# Altium PCB chess_timer.PcbDoc
Units mm, origin at the board's own origin, x right, y up, seen from the top; angles counter-clockwise.
Board outline 71.9 x 41.82 mm, 2 copper layers (Top Layer, Bottom Layer); 28 components, 21 nets, 104 pads, 20 vias.
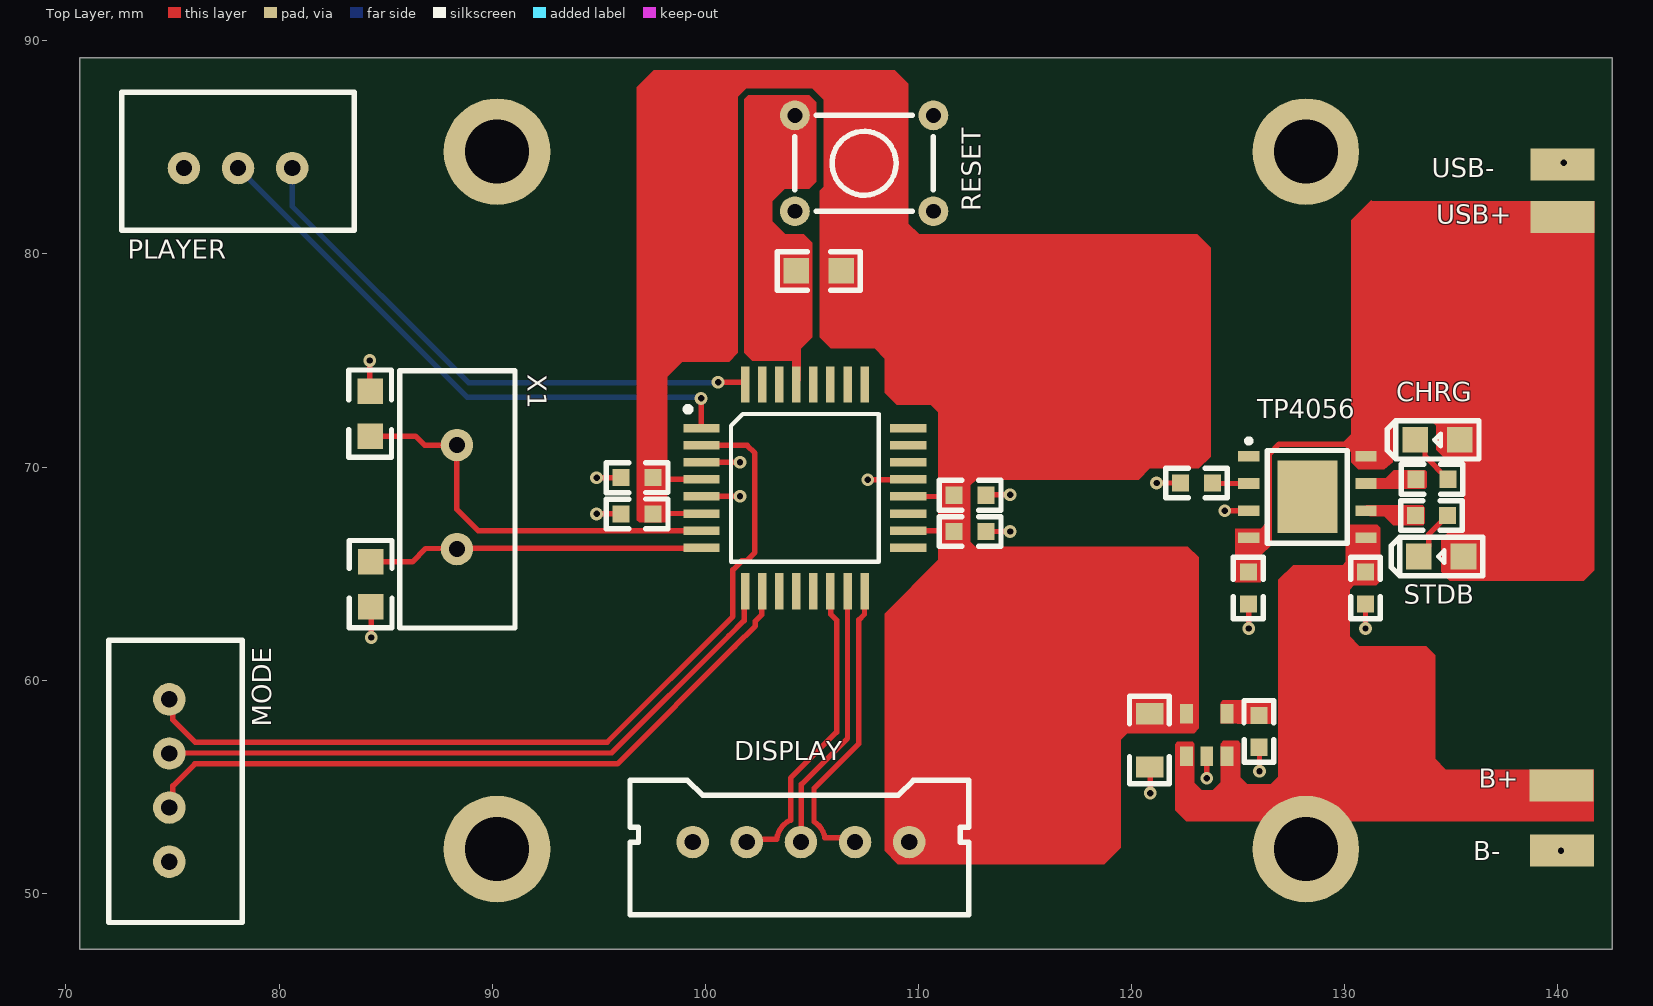
[diagram p0: Top Layer view]
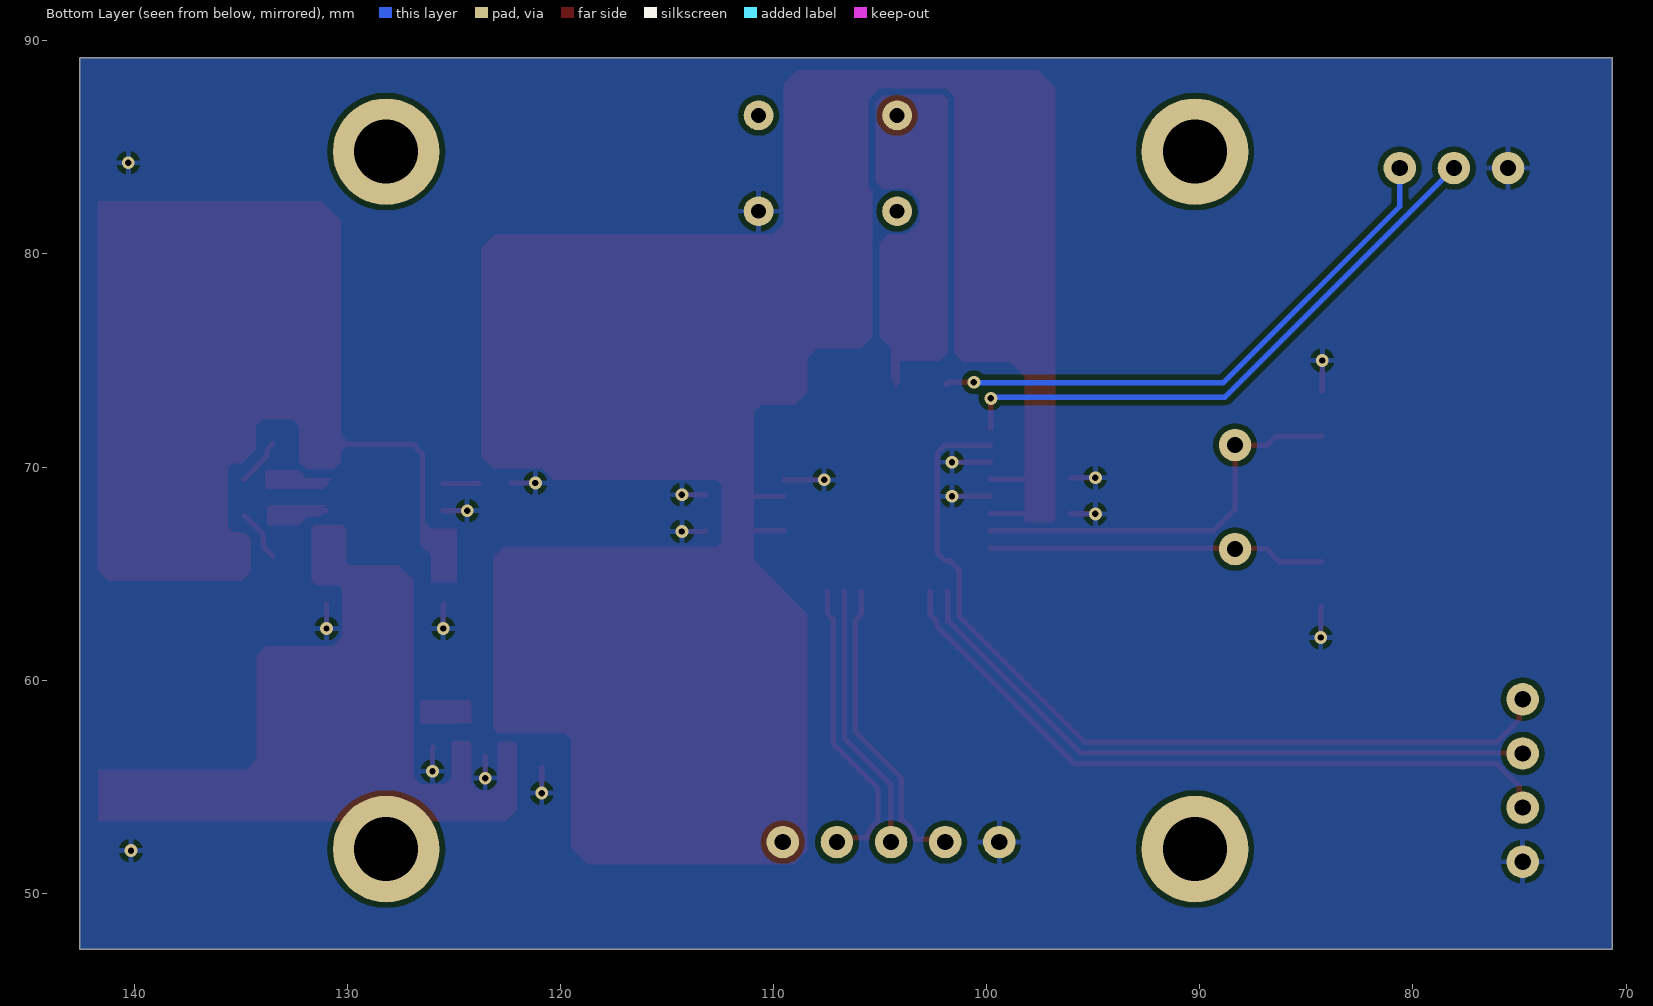
[diagram p1: Bottom Layer view, seen from below]
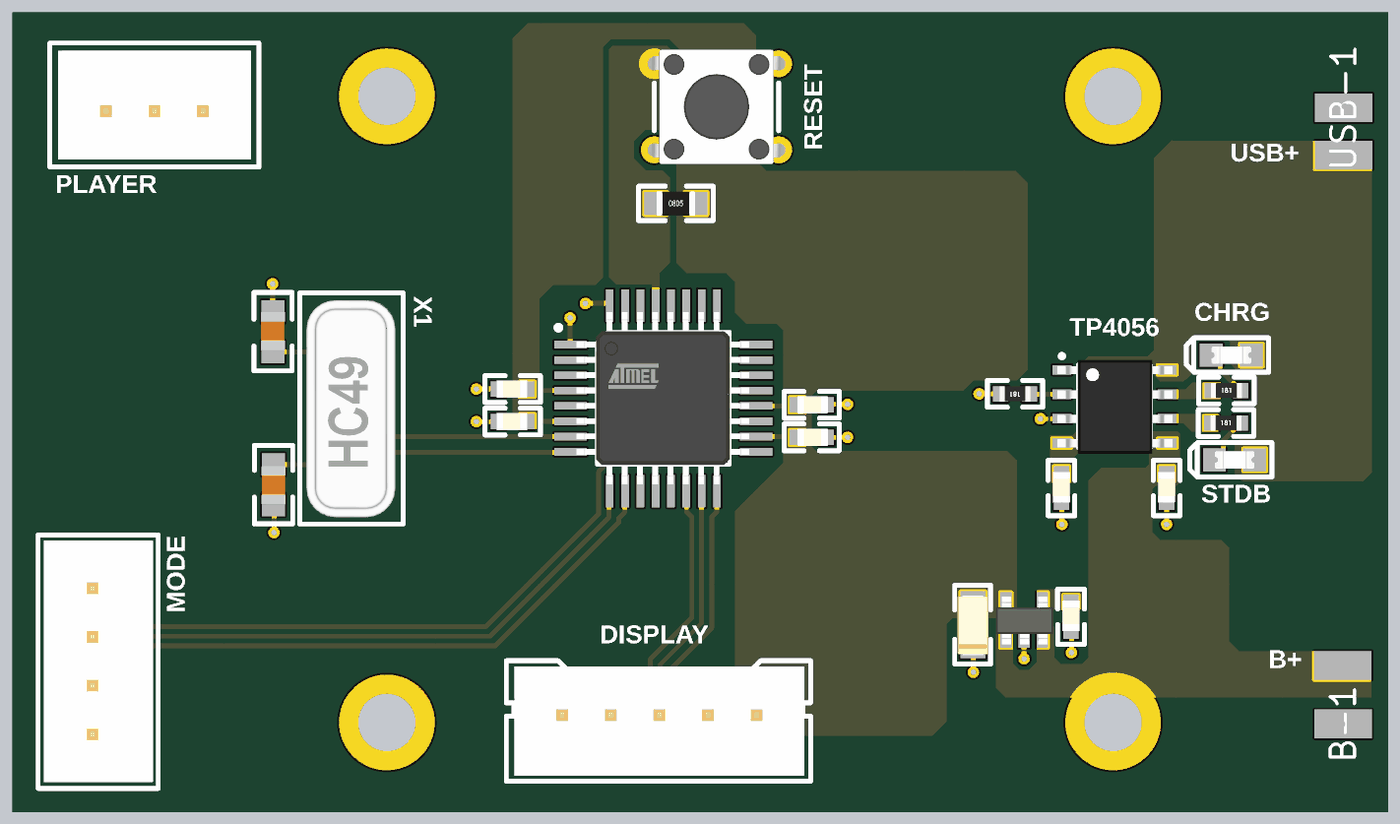
[diagram p2: 3D render of the assembled board from above, using the file's embedded part models]

## Layer stack, top to bottom
Top Solder: solder mask 0.0102, Solder Resist, Dk 3.5
Top Layer: signal copper 0.0356
Dielectric 1: dielectric 0.32, FR-4, Dk 4.8
Bottom Layer: signal copper 0.0356
Bottom Solder: solder mask 0.0102, Solder Resist, Dk 3.5

## Board outline
70.65,47.375 70.65,89.2 142.55,89.2 142.55,47.375

## Design rules (kind name [scope] priority, off if disabled: settings)
Clearance [All] p1: gap=0.254 ignorepadtopadclearanceinfootprint=FALSE except(0: Arc-Hole Track-Hole SMDPad-Hole THPad-Hole Via-Hole Fill-Hole Poly-Hole Region-Hole Text-Hole)
PolygonConnect [All] p1: connectstyle=Relief reliefconductorwidth=0.254 reliefentries=4 polygonreliefangle="90 Angle" airgapwidth=0.254
RoutingVias [All] p1: holewidth=0.711 width=1.27 viastyle="Through Hole" minholewidth=0.711 minwidth=1.27 maxholewidth=0.711 maxwidth=1.27
SolderMaskExpansion [All] p1: expansion=0.102 istentingtop=FALSE
Width [All] p1: maxlimit=0.254 minlimit=0.254 preferedwidth=0.254
30 further rules are at their usual default settings.

## Classes and differential pairs
component class chess_timer: X1

## Components (designator, comment, footprint, x,y, rotation, side; value= is the part's Value field where it differs from the comment)
2 "3.3v reg" "3.3v reg" 122.575,56.425 r0 top
B+ "PAD" PAD 140.175,55.05 r270 top (schematic designator B+1)
B- "PAD" PAD 140.2,52 r90 top (schematic designator B-1)
C1 "0603 CAP" "0603 CAP" 125.475,63.575 r90 top
C2 "0603 CAP" "0603 CAP" 130.975,63.575 r90 top
C3 "0805_CAPACITOR" 0805_CAP 84.275,73.55 r270 top
C4 "0805_CAPACITOR" 0805_CAP 84.3,63.45 r90 top
C5 "2.2uF TAN CAP" "2.2uF TAN CAP" 120.85,55.925 r90 top
C6 "0603 CAP" "0603 CAP" 97.55,67.8 r180 top
C7 "0603 CAP" "0603 CAP" 97.55,69.5 r180 top
C8 "0603 CAP" "0603 CAP" 111.675,68.675 r0 top
C9 "0603 CAP" "0603 CAP" 111.675,66.975 r0 top
C10 "0603 CAP" "0603 CAP" 125.975,56.85 r90 top
CHRG "SMD_0805_LED" 0805_LED 135.4,71.275 r180 top (schematic designator LED1)
DISPLAY "5_PIN_JST" 5_PIN_JST 109.565,52.4 r180 top (schematic designator 1)
MODE "I2C_JACK" 4PIN_JST 74.85,51.48 r90 top (schematic designator I1)
PLAYER "hall_jst" hall_jst 80.615,84.025 r180 top (schematic designator HALL_1)
R1 "0805_RES" 0805_RES 104.275,79.2 r0 top
R2 "0603 RES" "0603 RES" 134.85,69.425 r180 top
R3 "0603 RES" "0603 RES" 134.825,67.725 r180 top
R4 "0603 RES" "0603 RES" 122.3,69.25 r0 top
RESET "push_button" DIP_button 107.45,84.25 r180 top (schematic designator BT1)
STDB "SMD_0805_LED" 0805_LED 135.575,65.8 r180 top (schematic designator LED2)
TP4056 "tp4056" tp4056 128.325,68.625 r0 top (schematic designator SOP1)
U1 "atmega328p" atmega328p 99.822,71.818 r0 top
USB+ "PAD" PAD 140.225,81.725 r90 top (schematic designator USB+1)
USB- "PAD" PAD 140.225,84.2 r90 top (schematic designator USB-1)
X1 "CRYSTAL" CRYSTAL 88.344,66.148 r90 top

## Footprints (in the part's own frame and the unit in brackets; to place one, negate y for a bottom-side part, rotate by r counter-clockwise, add the part's x,y. Pads: shape width x height; smd on the part's side, far side on the other; paste and mask are expansions set on the pad)
"2.2uF TAN CAP" [mm]
  rect 1x1.3 smd: 1(0,0) 2(2.5,0)
  silkscreen extent -0.79,-0.93 3.32,0.95, body extent -0.33,-0.8 2.77,0.8, height 1.31
"3.3v reg" [mm]
  rect 0.6x0.9 smd: 1(0,0) 2(0.95,0) 3(1.9,0) 4(1.9,2) 5(0,2)
  body extent -0.52,-0.27 2.48,2.23, height 1.1
4PIN_JST [mil]
  round 60 hole 30: 1(0,0) 2(100,0) 3(200,0) 4(300,0)
  silkscreen extent -112,-135 409,112, body extent -99,-124 398,100, height 276
5_PIN_JST [mil]
  round 60 hole 30: 1(0,0) 2(100,0) 3(200,0) 4(300,0) 5(400,0)
  silkscreen extent -110,-114 516,134, body extent -98,-102 499,122, height 276
"0603 CAP" [mm]
  rect 0.8x0.8 smd: 1(0,0) 2(1.5,0)
  silkscreen extent -0.7,-0.7 2.2,0.7, body extent 0,-0.45 1.6,0.45, height 0.8
"0603 RES" [mm]
  rect 0.8x0.8 smd: 1(0,0) 2(1.5,0)
  silkscreen extent -0.7,-0.7 2.2,0.7, body extent -0.05,-0.4 1.55,0.4, height 0.45
0805_CAP [mm]
  rect 1.2x1.2 smd: 1(0,0) 2(2.1,0)
  silkscreen extent -1,-1 3.1,1, body extent 0.03,-0.63 2.02,0.63, height 0.6
0805_LED [mm]
  rect 1.2x1.2 smd: 1(0,0) 2(2.1,0)
  silkscreen extent -0.9,-0.9 3.4,0.9, body extent 0.01,-0.45 2.07,0.45, height 0.85
0805_RES [mm]
  rect 1.2x1.2 smd: 1(0,0) 2(2.1,0)
  silkscreen extent -0.9,-0.9 3,0.9, body extent 0.05,-0.62 2.05,0.63, height 0.5
atmega328p [mm]
  rect 1.7x0.4 smd: 1(0,0) 2(0,-0.8) 3(0,-1.6) 4(0,-2.4) 5(0,-3.2) 6(0,-4) 7(0,-4.8) 8(0,-5.6) 17(9.7,-5.6) 18(9.7,-4.8) 19(9.7,-4) 20(9.7,-3.2) 21(9.7,-2.4) 22(9.7,-1.6) 23(9.7,-0.8) 24(9.7,0)
  rect 0.4x1.7 smd: 9(2.05,-7.65) 10(2.85,-7.65) 11(3.65,-7.65) 12(4.45,-7.65) 13(5.25,-7.65) 14(6.05,-7.65) 15(6.85,-7.65) 16(7.65,-7.65) 25(7.65,2.05) 26(6.85,2.05) 27(6.05,2.05) 28(5.25,2.05) 29(4.45,2.05) 30(3.65,2.05) 31(2.85,2.05) 32(2.05,2.05)
  silkscreen extent -0.76,-6.27 8.32,1.02, body extent 0.32,-7.3 9.33,1.71, height 1.15
CRYSTAL [mil]
  round 60 hole 30: 1(0,0) 2(192.13,0)
  silkscreen extent -146,-107 330,105, body extent -132,-92 315,92, height 144
DIP_button [mm]
  round 1.4 hole 0.7: 1(-3.25,2.25) 2(-3.25,-2.25) 3(3.25,2.25) 4(3.25,-2.25)
  silkscreen extent -3.25,-2.25 3.25,2.25, body extent -3.85,-3 3.85,3, height 4.95
hall_jst [mil]
  round 60 hole 30: 1(0,0) 2(100,0) 3(200,0)
  silkscreen extent -115,-140 315,115, body extent -98,-124 298,100, height 276
PAD [mm]
  rect 1.5x3 smd: 1(0,0)
tp4056 [mm]
  rect 1x0.5 smd: 1(-2.825,1.875) 2(-2.825,0.6) 3(-2.825,-0.675) 4(-2.825,-1.95) 5(2.675,-1.95) 6(2.675,-0.675) 7(2.675,0.6) 8(2.675,1.875)
  rect 2.8x3.4 smd: 9(-0.075,-0.025)
  silkscreen extent -2.91,-2.2 1.8,2.69, body extent -3.05,-2.5 2.95,2.4, height 1.75

## Part data
RESET: "DIP tacttil push button"

## Free pads (board coordinates)
  round 5 hole 3: 3(90.225,52.075) 3(90.225,84.8) 3(128.175,52.075) 3(128.175,84.8)

## Via types
v1: diameter 0.6, hole 0.3, Top Layer to Bottom Layer, 20 vias

## Nets (pads, with @x,y where several pads share a name; then routed paths per layer and width w, separated by ;. In a path a pad name is that pad's centre, name@x,y a point inside that pad or via, vN(x,y) a via of type N, cw(c..) or ccw(c..) an arc to the next point about the centre after c; other vN are vias at no path point)
Net1_1: 2.5 C5.2 C6.1 C7.1 C8.1 C9.1 DISPLAY.1 R1.2 U1.4 U1.6 U1.18 U1.20 | length 52.4
  Top Layer w0.254: C6.1 97.568,67.818 U1.6 ; C7.1 97.632,69.418 U1.4 ; R1.2 108.429,79.2 108.449,79.22 110.03,79.22 111.675,77.575 C8.1 ; U1.18 111.632,67.018 C9.1 ; U1.20 111.618,68.618 C8.1 ; DISPLAY.1 109.565,56.24 111.75,58.425 113.025,58.425 ; 2.5 C5.2 113.025,58.425 ; C9.1 C8.1 ; C9.1 111.675,63.275 113.025,61.925 113.025,58.425
Net1_2: DISPLAY.2 U1.16 | length 14.2
  Top Layer w0.254: DISPLAY.2 106.821,52.604 105.805,52.604 105.61,52.604 ccw(c104.485,52.4) 105.1,53.363 105.1,54.925 107.2,57.025 107.2,62.825 107.467,63.092 107.467,64.163 U1.16
Net1_3: DISPLAY.3 U1.15 | length 12.7
  Top Layer w0.254: DISPLAY.3 104.508,52.423 104.508,55.108 106.672,57.272 U1.15
Net1_4: DISPLAY.4 U1.14 | length 14.4
  Top Layer w0.254: DISPLAY.4 102.072,52.527 103.349,52.527 cw(c104.485,52.4) 104,53.435 104,55.4 106.164,57.564 106.164,62.811 105.88,63.095 105.88,64.16 U1.14
Net1_5: 2.2 B-.1 C1.1 C2.1 C3.1 C4.1 C5.1 C6.2 C7.2 C8.2 C9.2 C10.1 DISPLAY.5 MODE.1 PLAYER.3 R4.1 RESET.1 TP4056.3 U1.3 U1.5 U1.21 USB-.1 | length 21
  Top Layer w0.254: v1(84.25,75) 84.25,73.575 C3.1 ; C4.1 84.325,63.425 v1(84.325,62) ; v1(94.9,67.8) C6.2 ; v1(94.9,69.5) C7.2 ; U1.5 99.826,68.622 101.621,68.622 v1(101.625,68.625) ; U1.3 99.826,70.222 101.622,70.222 v1(101.625,70.225) ; v1(107.625,69.4) 107.634,69.409 109.513,69.409 U1.21 ; C9.2 v1(114.3,66.975) ; C8.2 113.2,68.7 v1(114.3,68.7) ; C5.1 120.875,55.9 v1(120.875,54.7) ; v1(121.175,69.25) R4.1 ; v1(123.525,55.4) 2.2 ; v1(124.375,67.95) TP4056.3 ; C1.1 125.5,63.55 v1(125.5,62.425) ; C10.1 126,56.825 v1(126,55.725) ; v1(130.975,62.425) C2.1
  other v1: 140.15,52 140.275,84.275
Net2_1: 2.1 2.3 B+.1 C2.2 pad.3@128.175,52.075 TP4056.5 | length 26.4
  Top Layer w0.254: 2.3 124.475,55.45 124.875,55.05 ; TP4056.5 130.975,66.65 C2.2 129.575,65.075 128.725,64.225 128.725,55.05 B+.1
Net2_4: 2.4 C10.2 | length 1.5
  Top Layer w0.254: 2.4 124.55,58.35 C10.2
NetBT1_4: R1.1 RESET.4 U1.29 | length 17.1
  Top Layer w0.254: RESET.4 104.15,86.45 102.975,86.45 102.2,85.675 102.2,79.25 ; U1.29 104.199,73.941 104.199,75.701 102.2,77.7 102.2,79.25 ; R1.1@104.272,79.197 R1.1 102.25,79.2 102.2,79.25
NetC1_2: C1.2 CHRG.1 STDB.1 TP4056.4 TP4056.8 USB+.1 | length 34.7
  Top Layer w0.254: C1.2 125.475,66.65 126.431,66.65 126.469,66.688 126.469,70.619 126.925,71.075 130.448,71.075 ; STDB.1 135.725,65.65 137.65,65.65 140.225,68.225 140.225,71.525 ; CHRG.1@135.6,71.325 135.8,71.525 140.225,71.525 ; USB+.1 140.225,71.525
NetC3_2: C3.2 U1.7 X1.2 | length 19.2
  Top Layer w0.254: C3.2 86.4,71.45 86.822,71.028 X1.2 88.344,68.006 89.332,67.018 U1.7
NetC4_2: C4.2 U1.8 X1.1 | length 15.8
  Top Layer w0.254: C4.2 86.25,65.55 86.875,66.175 88.317,66.175 X1.1 88.379,66.183 99.787,66.183 U1.8
NetHALL_1_1: PLAYER.1 U1.32 | length 26.6
  Top Layer w0.254: PLAYER.1 PLAYER.1@80.671,84.025 ; v1(100.6,73.975) 101.799,73.975 101.872,73.902 U1.32
  Bottom Layer w0.254: PLAYER.1 80.615,82.235 88.9,73.95 100.575,73.95 v1(100.6,73.975)
NetHALL_1_2: PLAYER.2 U1.1 | length 27.6
  Top Layer w0.254: v1(99.8,73.219) 99.8,71.84 U1.1
  Bottom Layer w0.254: PLAYER.2 88.825,73.275 99.744,73.275 v1(99.8,73.219)
NetI1_2: MODE.2 U1.10 | length 33.3
  Top Layer w0.254: MODE.2 75.014,54.184 75.014,55.039 76.05,56.075 95.875,56.075 101.375,61.575 102.35,62.55 102.35,62.775 102.65,63.075 102.65,64.146 U1.10
NetI1_3: MODE.3 U1.9 | length 30.9
  Top Layer w0.254: MODE.3 74.873,56.583 95.608,56.583 101.108,62.083 101.817,62.792 101.817,64.113 U1.9
NetI1_4: MODE.4 U1.2 | length 41.1
  Top Layer w0.254: MODE.4 75.004,58.946 75.004,58.146 76.059,57.091 95.398,57.091 101.291,62.984 101.291,65.176 101.716,65.6 101.925,65.6 102.325,66 102.325,70.65 101.957,71.018 U1.2
NetLED1_2: CHRG.2 R2.1 | length 2.2
  Top Layer w0.254: CHRG.2@133.5,71.075 133.765,70.81 133.765,70.51 R2.1
NetLED2_2: R3.1 STDB.2 | length 2.5
  Top Layer w0.254: STDB.2 133.948,66.273 133.948,66.848 R3.1
NetR2_2: R2.2 TP4056.7 | length 2.4
  Top Layer w0.254: TP4056.7 133.15,69.225 R2.2
NetR3_2: R3.2 TP4056.6 | length 2.4
  Top Layer w0.254: TP4056.6 133.1,67.95 R3.2
NetR4_2: R4.2 TP4056.2 | length 1.7
  Top Layer w0.254: R4.2 123.825,69.225 TP4056.2
pads on no net: RESET.2 RESET.3 TP4056.1 TP4056.9 U1.11 U1.12 U1.13 U1.17 U1.19 U1.22 U1.23 U1.24 U1.25 U1.26 U1.27 U1.28 U1.30 U1.31
copper on no net: | length 0.1
  Top Layer w0.254: 128.125,84.725 128.125,84.75 128.175,84.8

## Polygon pours and split planes (outlines as drawn)
Net1_5 on Bottom Layer "NONET_L-01_P-001" (solid, pour order 0): 70.65,89.2 142.55,89.2 142.55,47.375 70.65,47.375

## Other copper
Top Layer:
  region net NetBT1_4: 104.199,74.379 104.475,74.017 104.475,75.55 105.025,76.1 105.025,80.525 104.625,80.925 103.75,80.925 103.15,81.525 103.15,82.475 103.725,83.05 104.875,83.05 105.2,83.375 105.2,87.125 104.875,87.45 102.025,87.45 101.825,87.25 101.825,77.725 101.825,75.35 102.2,74.975 104.199,74.975
  region net Net1_1: 98.925,74.95 101.125,74.95 101.525,75.35 101.525,87.375 101.913,87.762 105.012,87.763 105.55,87.225 105.55,83.15 105.363,82.963 105.363,80.538 105.363,76.088 105.888,75.563 107.938,75.563 108.413,75.087 108.413,73.487 108.988,72.912 110.588,72.913 110.937,72.563 110.938,65.638 108.413,63.113 108.413,51.988 109.038,51.363 118.713,51.363 119.488,52.138 119.488,57.213 119.788,57.513 122.938,57.513 123.163,57.738 123.163,65.774 122.635,66.263 112.663,66.263 112.438,66.487 112.438,69.138 112.713,69.413 120.338,69.413 120.863,69.937 123.163,69.938 123.713,70.488 123.713,80.288 123.088,80.913 110.037,80.913 109.525,81.425 109.525,87.975 108.888,88.613 97.588,88.613 96.788,87.813 96.788,67.512 96.9,67.4 98.213,67.4 98.213,74.238
  region net NetC1_2: 130.382,70.65 129.925,71.025 129.8,71.025 130.382,71.607
  region net NetC1_2: 126.575,66.625
  region net NetC1_2: 126.05,65.85 126.575,66.351 126.575,66.897 126.35,67.1 126.35,67.4 126.05,67.1
  region net Net2_1: 124.775,53.375 141.675,53.375 141.675,55.8 134.75,55.8 134.25,56.3 134.25,61.175 133.825,61.6 130.675,61.6 130.225,62.05 130.225,64.25 130.425,64.45 131.475,64.45 131.675,64.65 131.675,67.15 131.525,67.3 130.225,67.3 130.05,67.125 130.05,65.55 129.9,65.4 127.575,65.4 126.875,64.7 126.875,55.475 126.525,55.125 125.425,55.125 125.1,55.45 125.1,57.05 125,57.15 124.3,57.15 124.175,57.025 124.175,55.2 123.8,54.825 123.3,54.825 122.95,55.175 122.95,57.025 122.875,57.1 122.15,57.1 122.05,57 122.05,53.9 122.575,53.375
  region net NetC1_2: 124.875,64.6 124.875,67.1 126.05,67.1 126.05,64.6
  region net Net2_4: 124.175,57.975 124.175,58.95 124.275,59.05 126.5,59.05 126.575,58.975 126.575,58.025 126.5,57.95 124.95,57.95 124.925,57.975
  region net NetC1_2: 134.525,66.625 134.525,65.075 134.925,64.675 141.225,64.675 141.7,65.15 141.7,82.475 135.6,82.475 131.3,82.475 131.25,82.525 130.3,81.575 130.3,70.225 130.625,69.9 131.86,69.9 132.25,70.225 132.25,71.9 132.6,72.25 133.975,72.25 134.3,71.925 134.3,70.8 134.925,70.175 135.375,70.175 135.6,69.95 135.6,67.225 135.325,66.95 134.85,66.95
  region net NetR3_2: 130.95,68.2 133.65,68.2 133.75,68.1 133.75,67.35 133.675,67.275 132.275,67.275 131.85,67.7 131.175,67.7 131.175,68 131.225,68.05
  region net NetR2_2: 130.75,69.475 131.925,69.475 132.3,69.85 133.775,69.85 133.85,69.775 133.85,69.05 133.775,68.975 131.1,68.975

## Silkscreen, mask and mechanical layers (free items; w line width, h text height)
Mechanical 1:
  the board outline again, w0.254